# EAGLE board riffle-CTL-0.2-blank (EAGLE 6.2)
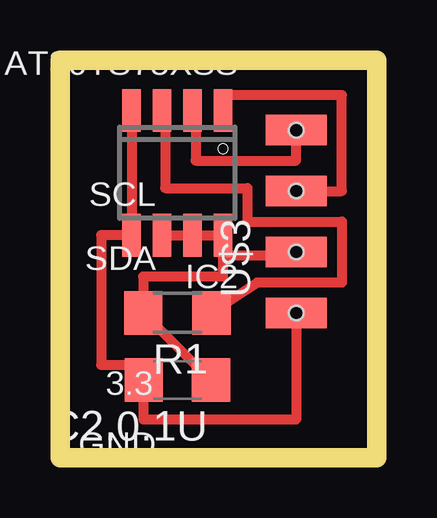
[diagram p0: board, top side]

Size 13.21 x 16.57 mm. Coordinates in mm from the lower left corner, seen from the top.
Outline: 0,16.57 13.21,16.57 13.21,0 0,0 0,16.57
Copper layers (1*16): Top 0.0356mm / dielectric 1.5011mm / Bottom 0.0356mm
Design rules: minimum track width 6mil, minimum drill 13mil, track to track 6mil, track to pad 6mil, pad to pad 6mil, via to via 6mil, smd to smd 6mil, copper to edge 15mil, drill to drill 6mil, minimum pad ring 7mil, minimum via ring 7mil, stop-mask expansion 3mil, vias tented up to drill 0mil, thermal gap 10mil
Net classes: 0 default: width 0.203 mm, drill 0.33 mm, clearance 0.203 mm

## Footprints (pad centres in the part's own frame; a part is rotated, then mirrored left to right if it is on the bottom)
C1206 = smd 1.6 x 1.8: 1 -1.4,0; 2 1.4,0
SO8 = smd 0.762 x 1.778: 1 -1.905,-2.6; 2 -0.635,-2.6; 3 0.635,-2.6; 4 1.905,-2.6; 5 1.905,2.6; 6 0.635,2.6; 7 -0.635,2.6; 8 -1.905,2.6
R1206 = smd 1.6 x 1.803: 1 -1.422,0; 2 1.422,0
1X04THROUGHHOLE = smd 2.54 x 1.27: GND 1.27,-2.54; SCL 1.27,5.08; SDA 1.27,2.54; VCC 1.27,0 | hole 0.6: 1.27,5.08; 1.27,2.54; 1.27,0; 1.27,-2.54

## Placement (x,y rotation side)
C2.0.1U  CAP-US1206  [C1206]  4.89,3.24 180 top
IC2  AT30TS75XSS  [SO8]  4.89,11.87 180 top
R1  [R1206]  4.89,6.03 180 top
U$3  4PINHEADERTHROUGHHOLE  [1X04THROUGHHOLE]  8.57,8.57 0 top

## Library data of the parts
C2.0.1U R1 = fab
IC2 = atmel-at30ts75x
U$3 = tempSensor

## Nets
D2: IC2.3 R1.1
GND: C2.0.1U.2 IC2.4 IC2.5 U$3.GND
N$4: IC2.2 U$3.SCL
SDA: IC2.1 U$3.SDA
VCC: C2.0.1U.1 IC2.6 IC2.7 IC2.8 R1.2 U$3.VCC

## Tracks (layer width: path | path; a pad name or v marks a point on that pad's centre or on a via)
D2
  Top 0.406: IC2.3 4.38,14.22 4.38,11.24 7.81,11.24 7.81,9.84 11.75,9.84 11.75,7.3 8.22,7.3 R1.1
GND
  Top 0.406: 2.98,9.59 IC2.5 | IC2.4 IC2.5 | U$3.GND 9.84,1.59 3.49,1.59 C2.0.1U.2 3.49,3.87 1.71,3.87 1.71,9.27 IC2.5
N$4
  Top 0.406: IC2.2 5.65,14.22 5.65,12.38 9.84,12.38 U$3.SCL
SDA
  Top 0.406: IC2.1 6.92,14.22 6.92,15.11 11.75,15.11 11.75,11.11 U$3.SDA
VCC
  Top 0.406: 6.79,8.95 IC2.8 | 9.84,8.95 U$3.VCC | 6.79,8.45 6.79,7.56 3.47,7.56 R1.2 C2.0.1U.1 | 9.84,9.02 U$3.VCC | IC2.6 IC2.7 IC2.8 | IC2.8 6.79,8.45 | 6.79,8.45 9.84,8.45 U$3.VCC

## Text on the board
tPlace: SCL | SDA | 3.3 | GND